# Altium PCB MainDesign_Small.PcbDoc
Units mm, origin at the board's own origin, x right, y up, seen from the top; angles counter-clockwise.
Board outline 20.1 x 20.19 mm, 2 copper layers (Top Layer, Bottom Layer); 51 components, 39 nets, 207 pads, 58 vias.
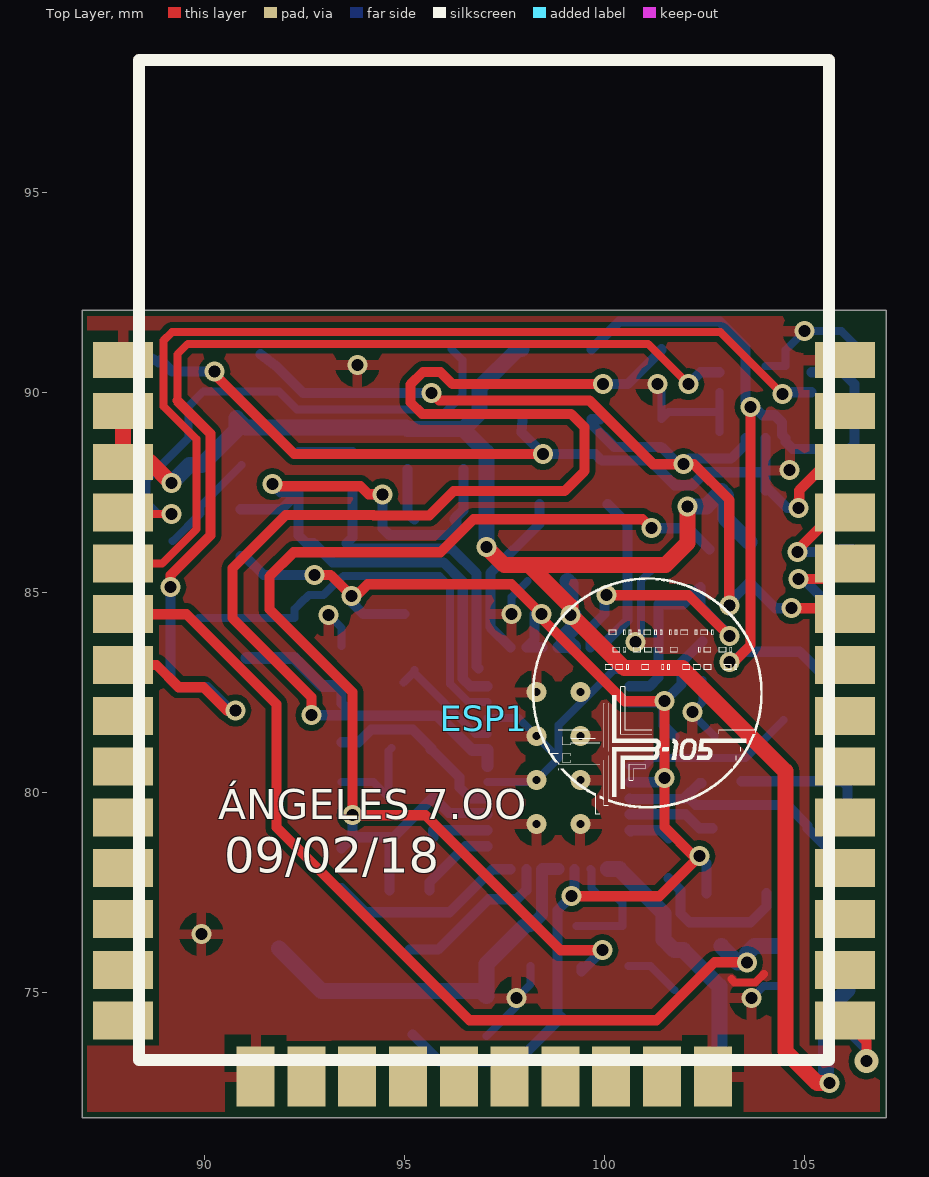
[diagram p0: Top Layer view]
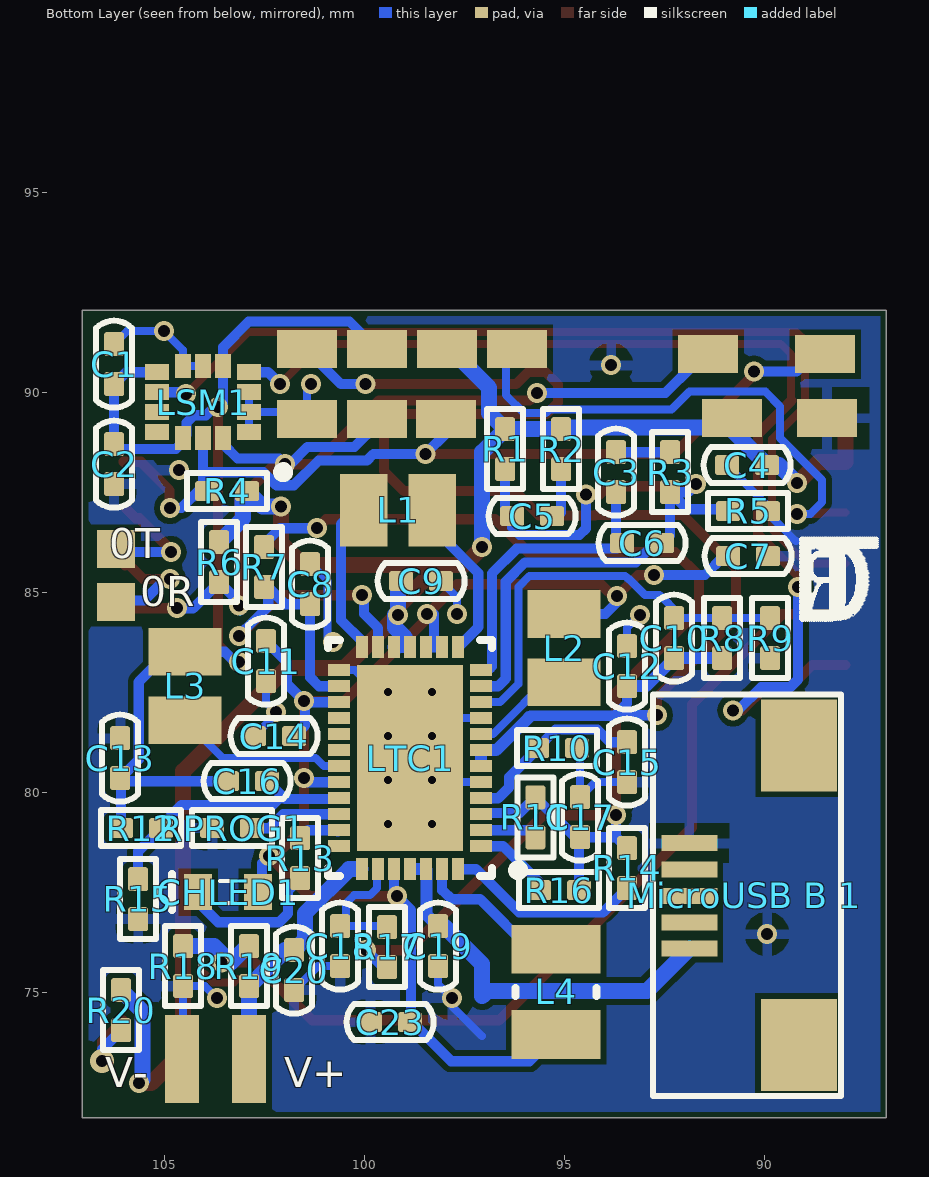
[diagram p1: Bottom Layer view, seen from below]
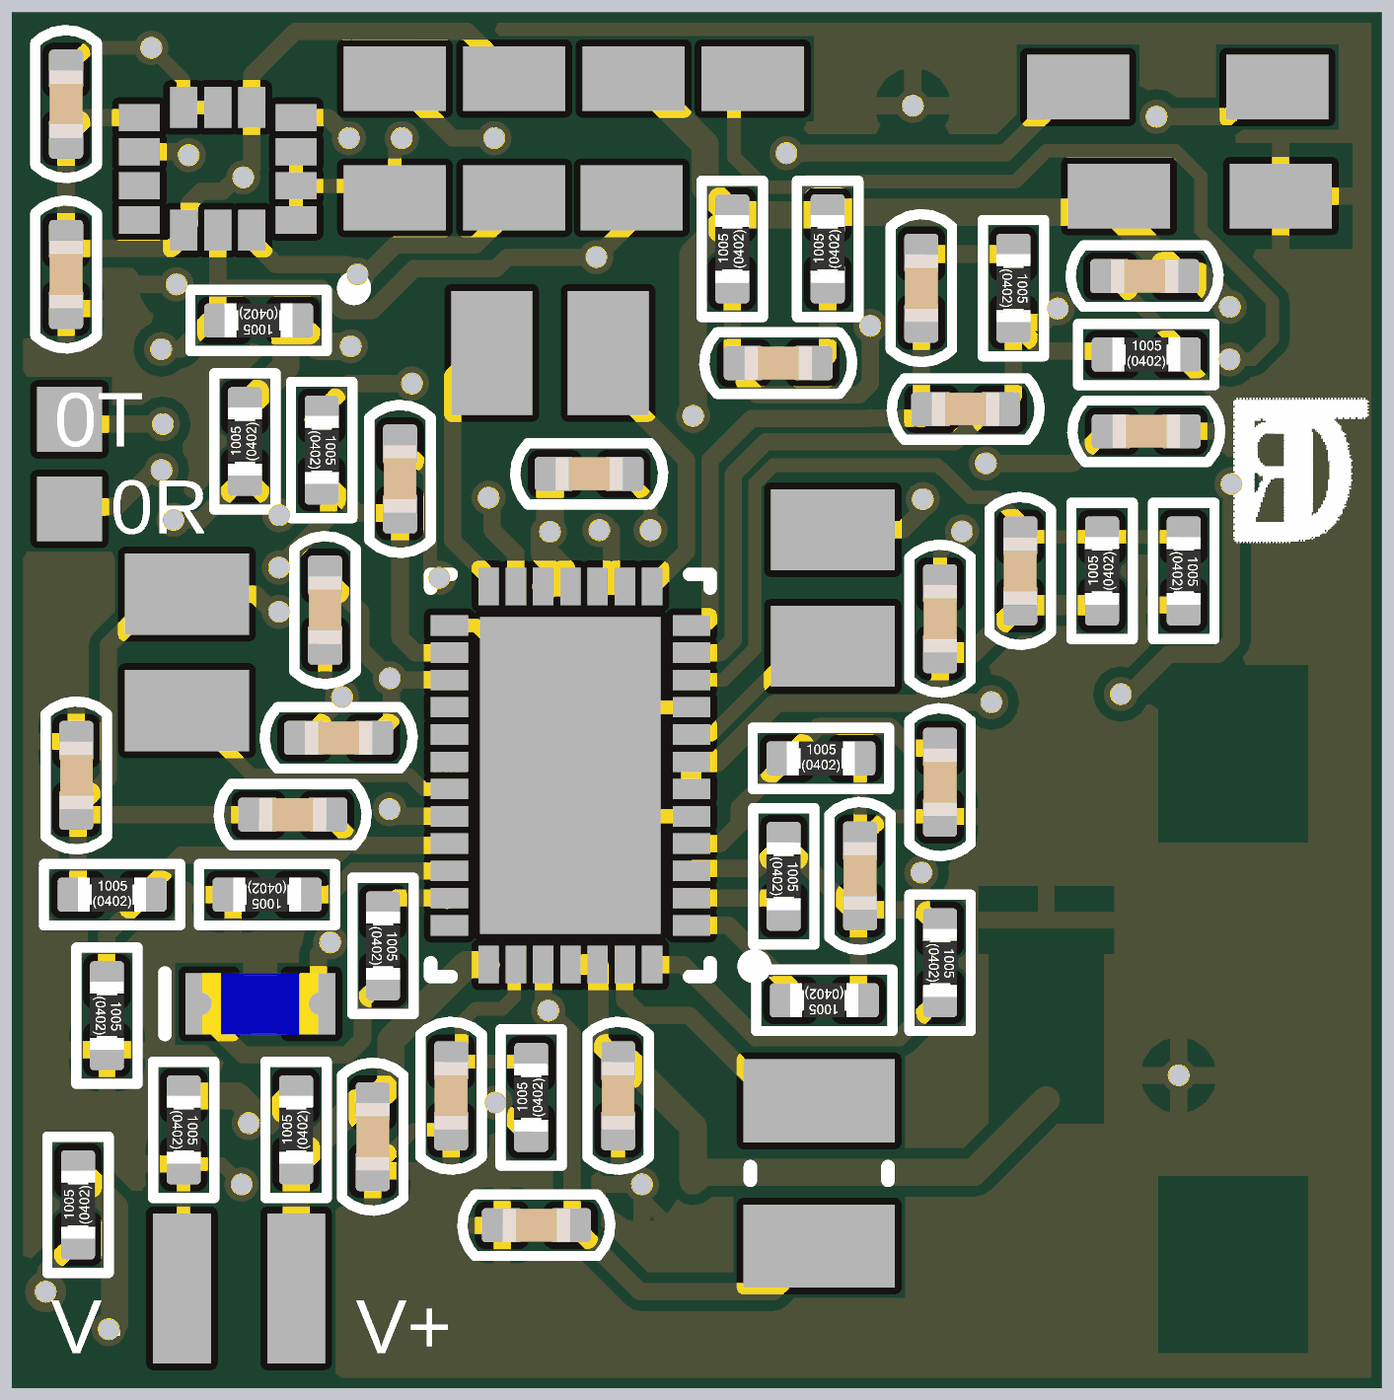
[diagram p2: 3D render of the assembled board from below, using the file's embedded part models]

## Layer stack, top to bottom
Top Solder: solder mask 0.0102, Solder Resist, Dk 3.5
Top Layer: signal copper 0.0356
Dielectric 1: dielectric 0.32, FR-4, Dk 4.8
Bottom Layer: signal copper 0.0356
Bottom Solder: solder mask 0.0102, Solder Resist, Dk 3.5

## Board outline
86.944,71.857 86.944,92.05 107.048,92.05 107.048,71.857

## Design rules (kind name [scope] priority, off if disabled: settings)
Clearance [All] p1: gap=0.15 ignorepadtopadclearanceinfootprint=TRUE except(0: Arc-Hole Track-Hole SMDPad-Hole THPad-Hole Via-Hole Fill-Hole Poly-Hole Region-Hole Text-Hole; 0.09: Arc-Arc Arc-Track Arc-SMDPad Track-Track Track-SMDPad SMDPad-SMDPad)
ComponentClearance VbatClearance [InComponent('10114830')] p1: gap=0.01 collisioncheckmode=3 verticalgap=0.01 showdistances=FALSE
ComponentClearance ComponentClearance_1 [All] p2: gap=0.254 collisioncheckmode=3 verticalgap=0.254 showdistances=FALSE
HoleSize [All] p1: absolutevalues=TRUE maxlimit=6.3 minlimit=0.3 maxpercent=80.000 minpercent=20.000
PolygonConnect [All] p1: connectstyle=Relief reliefconductorwidth=0.25 reliefentries=4 polygonreliefangle="90 Angle" airgapwidth=0.3
RoutingVias [All] p1: holewidth=0.3 width=0.6 viastyle="Through Hole" minholewidth=0.3 minwidth=0.6 maxholewidth=6.3 maxwidth=10.6
SilkToSilkClearance [All] p1: silktosilkclearance=0
SilkToSolderMaskClearance [IsPad] p1: minsilkscreentomaskgap=0 clearancetoexposedcopper=TRUE
SolderMaskExpansion [All] p1: expansion=0.102
Width [All] p1: maxlimit=10 minlimit=0.15 preferedwidth=0.25
26 further rules are at their usual default settings.

## Components (designator, comment, footprint, x,y, rotation, side; value= is the part's Value field where it differs from the comment)
C1 "Cap" "0402 CAP" 106.25,90.7 r270 bottom value=100n (schematic designator C4)
C2 "Cap" "0402 CAP" 106.25,88.2 r90 bottom value=100n (schematic designator C3)
C3 "Cap" "0402 CAP" 93.7,88 r270 bottom value=330p (schematic designator C19)
C4 "Cap" "0402 CAP" 90.425,88.175 r180 bottom value=100u (schematic designator C5)
C5 "Cap" "0402 CAP" 95.8,86.9 r0 bottom value=33p (schematic designator C23)
C6 "Cap" "0402 CAP" 93.05,86.225 r0 bottom value=10p (schematic designator C20)
C7 "Cap" "0402 CAP" 90.4,85.9 r0 bottom value=2.2u (schematic designator C22)
C8 "Cap" "0402 CAP" 101.35,85.2 r270 bottom value=100n
C9 "Cap" "0402 CAP" 98.575,85.275 r0 bottom value=22u (schematic designator C21)
C10 "Cap" "0402 CAP" 92.25,83.85 r270 bottom value=10p (schematic designator C16)
C11 "Cap" "0402 CAP" 102.45,83.275 r270 bottom value=1u (schematic designator C18)
C12 "Cap" "0402 CAP" 93.425,83.15 r270 bottom value=22u/100u (schematic designator C15)
C13 "Cap" "0402 CAP" 106.1,80.85 r270 bottom value=10u (schematic designator C14)
C14 "Cap" "0402 CAP" 102.25,81.4 r180 bottom value=10u (schematic designator C17)
C15 "Cap" "0402 CAP" 93.425,80.75 r90 bottom value=100n (schematic designator C12)
C16 "Cap" "0402 CAP" 102.925,80.275 r0 bottom value=10p (schematic designator C13)
C17 "Cap" "0402 CAP" 94.6,79.375 r270 bottom value=1u (schematic designator C11)
C18 "Cap" "0402 CAP" 100.6,76.15 r90 bottom value=1u (schematic designator C10)
C19 "Cap" "0402 CAP" 98.15,76.15 r90 bottom value=22u/100u (schematic designator C6)
C20 "Cap" "0402 CAP" 101.75,75.55 r270 bottom value=4.7u (schematic designator C9)
C23 "Cap" "0402 CAP" 99.35,74.25 r180 bottom value=22u (schematic designator C7)
CHLED1 "LED" "0603 LED-BLUE" 103.4,77.5 r0 bottom
ESP1 "ESP32" ESP32 94.97,85.8 r0 top locked
L1 "L?" "Inductor 0806 [2016]" 99.15,87.05 r0 bottom value=2.2u (schematic designator L4)
L2 "L?" "Inductor 0806 [2016]" 95,83.6 r90 bottom value=2.2u (schematic designator L3)
L3 "L?" "Inductor 0806 [2016]" 104.475,82.655 r90 bottom value=4.7u (schematic designator L2)
L4 "L?" "Inductor 1008 [2520]" 95.2,75.01 r270 bottom value=3.3u (schematic designator L1)
LSM1 "LSM6DS3" LSM6DS3 104.025,89.75 r0 bottom
LTC1 "LTC3586" LTC3586/LTC3586-1 98.85,80.85 r0 bottom
"MicroUSB B 1" "MicroUSB B 2.0" "MicroUSB B 2.0" 188.261,172.608 r90 bottom (schematic designator "MicroUSB B 2.0")
R1 "Res" "0402 Res" 96.475,88.575 r90 bottom value=324K (schematic designator R18)
R2 "Res" "0402 Res" 95.075,88.575 r90 bottom value=121K (schematic designator R20)
R3 "Res" "0402 Res" 92.35,88 r270 bottom value=15K (schematic designator R17)
R4 "Res" "0402 Res" 103.425,87.525 r0 bottom value=1K (schematic designator R1)
R5 "Res" "0402 Res" 90.4,87.025 r180 bottom value=105K (schematic designator R19)
R6 "Res" "0402 Res" 103.625,85.75 r90 bottom value=1K (schematic designator R3)
R7 "Res" "0402 Res" 102.5,85.625 r270 bottom value=1K (schematic designator R2)
R8 "Res" "0402 Res" 91.05,83.85 r90 bottom value=88k7 (schematic designator R14)
R9 "Res" "0402 Res" 89.85,83.85 r270 bottom value=16k9 (schematic designator R16)
R10 "Res" "0402 Res" 95.175,81.1 r180 bottom value=2K87 (schematic designator R12)
R11 "Res" "0402 Res" 95.72,79.37 r270 bottom value=0
R12 "Res" "0402 Res" 105.575,79.1 r180 bottom value=1M02 (schematic designator R13)
R13 "Res" "0402 Res" 101.6,78.35 r270 bottom value=1K (schematic designator R8)
R14 "Res" "0402 Res" 93.425,78.1 r270 bottom value=10K (schematic designator R6)
R15 "Res" "0402 Res" 105.65,77.325 r270 bottom value=806K
R16 "Res" "0402 Res" 95.125,77.55 r0 bottom value=0 (schematic designator R9)
R17 "Res" "0402 Res" 99.425,76.125 r90 bottom value=1K (schematic designator R7)
R18 "Res" "0402 Res" 104.525,75.65 r270 bottom value=4K3 (schematic designator R5)
R19 "Res" "0402 Res" 102.875,75.65 r90 bottom value=10K (schematic designator R4)
R20 "Res" "0402 Res" 106.075,74.55 r90 bottom value=0 (schematic designator R10)
RPROG1 "Res" "0402 Res" 103.3,79.1 r0 bottom value=3K57

## Footprints (in the part's own frame and the unit in brackets; to place one, negate y for a bottom-side part, rotate by r counter-clockwise, add the part's x,y. Pads: shape width x height; smd on the part's side, far side on the other; paste and mask are expansions set on the pad)
"0402 CAP" [mm] "Chip Capacitor, Body 1.0x0.5mm, IPC High Density"
  rrect25% 0.6x0.5 smd: 1(-0.5,0) 2(0.5,0)
  Top Layer pour cut-out: -0.2,0.25 -0.2,-0.25 0.2,-0.25 0.2,0.25
  silkscreen extent -1.09,-0.45 1.09,0.45, body extent -0.5,-0.25 0.5,0.25, height 0.49
"0402 Res" [mm] "Chip Resistor, Body 1.0x0.5mm, IPC High Density"
  rrect25% 0.6x0.5 smd: 1(-0.5,0) 2(0.5,0)
  Top Layer pour cut-out: -0.2,0.25 -0.2,-0.25 0.2,-0.25 0.2,0.25
  silkscreen extent -1,-0.45 1,0.45, body extent -0.5,-0.25 0.5,0.25, height 0.35
"0603 LED-BLUE" [mm] "LED, Body 1.6x0.8mm, IPC High Density"
  rect 0.7x0.9 smd: 1(-0.75,0) 2(0.75,0)
  silkscreen extent -0.2,-0.45 1.4,0.45, body extent -0.85,-0.45 0.85,0.45, height 0.9
ESP32 [mm]
  rect 1.5x0.9 smd: 1(-7,5) 2(-7,3.73) 3(-7,2.46) 36(11.05,2.46) 37(11.05,3.73) 38(11.05,5)
  rect 1.5x0.95 smd: 4(-7,1.19) 5(-7,-0.08) 6(-7,-1.35) 7(-7,-2.62) 8(-7,-3.89) 9(-7,-5.16) 10(-7,-6.43) 11(-7,-7.7) 12(-7,-8.97) 13(-7,-10.24) 14(-7,-11.51) 25(11.05,-11.51) 26(11.05,-10.24) 27(11.05,-8.97) 28(11.05,-7.7) 29(11.05,-6.43) 30(11.05,-5.16) 31(11.05,-3.89) 32(11.05,-2.62) 33(11.05,-1.35) 34(11.05,-0.08) 35(11.05,1.19)
  rect 0.95x1.5 smd: 15(-3.69,-12.91) 16(-2.42,-12.91) 17(-1.15,-12.91) 18(0.12,-12.91) 19(1.39,-12.91) 20(2.66,-12.91) 21(3.93,-12.91) 22(5.2,-12.91) 23(6.47,-12.91) 24(7.74,-12.91)
  silkscreen extent -6.6,-12.5 10.65,12.5, body extent -6.63,-12.5 10.68,12.55, height 2
"Inductor 0806 [2016]" [mm]
  rect 1.19x1.82 smd: 1(-0.855,0) 2(0.855,0)
  body extent -1.1,-0.9 1.1,0.9, height 1
"Inductor 1008 [2520]" [mm]
  rect 1.22x2.22 smd: 1(-1.065,0) 2(1.065,0)
  silkscreen extent -0.1,-1.01 0.1,1.01, body extent -1.3,-1.1 1.3,1.1, height 1
LSM6DS3 [mm]
  rect 0.6x0.4 smd: 1(-1.15,0.75) 2(-1.15,0.25) 3(-1.15,-0.25) 4(-1.15,-0.75) 8(1.15,-0.75) 9(1.15,-0.25) 10(1.15,0.25) 11(1.15,0.75)
  rect 0.4x0.6 smd: 5(-0.5,-0.9) 6(0,-0.9) 7(0.5,-0.9) 12(0.5,0.9) 13(0,0.9) 14(-0.5,0.9)
  silkscreen extent -2.12,1.63 -1.88,1.87, body extent -1.55,-1.3 1.55,1.3, height 0.86
LTC3586/LTC3586-1 [mm]
  rect 0.55x0.3 smd: 1(-1.775,2.2) 2(-1.775,1.8) 3(-1.775,1.4) 4(-1.775,1) 5(-1.775,0.6) 6(-1.775,0.2) 7(-1.775,-0.2) 8(-1.775,-0.6) 9(-1.775,-1) 10(-1.775,-1.4) 11(-1.775,-1.8) 12(-1.775,-2.2) 20(1.775,-2.2) 21(1.775,-1.8) 22(1.775,-1.4) 23(1.775,-1) 24(1.775,-0.6) 25(1.775,-0.2) 26(1.775,0.2) 27(1.775,0.6) 28(1.775,1) 29(1.775,1.4) 30(1.775,1.8) 31(1.775,2.2)
  rect 0.3x0.55 smd: 13(-1.2,-2.775) 14(-0.8,-2.775) 15(-0.4,-2.775) 16(0,-2.775) 17(0.4,-2.775) 18(0.8,-2.775) 19(1.2,-2.775) 32(1.2,2.775) 33(0.8,2.775) 34(0.4,2.775) 35(0,2.775) 36(-0.4,2.775) 37(-0.8,2.775) 38(-1.2,2.775)
  rect 2.65x4.65 smd: 39(0,0)
  silkscreen extent -2.82,-2.95 2.05,2.95, body extent -2.05,-2.95 2.05,2.95, height 0.8
"MicroUSB B 2.0" [mm]
  rect 2.3x1.9 smd: 0(-98.933,-99.136) 0(-91.44,-99.136)
  rect 0.4x1.4 smd: 1(-96.52,-96.393) 2(-95.86,-96.393) 3(-95.199,-96.393) 4(-94.539,-96.393) 5(-93.878,-96.393)
  silkscreen extent -100.2,-100.18 -90.17,-95.48, body extent -99.6,-101.99 -90.8,-96.39, height 2.89

## Part data
L1 L2 L3 L4: library part Ind
LSM1: Supplier Part Number 1=497-15383-1-ND, Supplier 1=Digi-Key
LTC1: library part LTC3586/LTC3586-1

## Free pads (board coordinates)
  rect 1.5x0.95 smd far side: 5(88.425,89.35) 5(88.475,90.95) 5(90.8,89.35) 5(91.4,90.95) 5(96.175,91.075) 5(97.925,91.075) 5(97.95,89.325) 5(99.675,89.325) 5(99.675,91.075) 5(101.425,89.325) 5(101.425,91.075)
  rect 0.95x0.95 smd far side: 5(106.2,84.76) 5(106.2,86.075)
  rect 0.85x2.2 smd far side: 6(104.55,73.325) 7(102.875,73.325)

## Via types
v1: diameter 0.5, hole 0.3, Top Layer to Bottom Layer, tented both sides, 49 vias
v2: diameter 0.5, hole 0.2, Top Layer to Bottom Layer, 8 vias
v3: diameter 0.6, hole 0.3, Top Layer to Bottom Layer, tented both sides, 1 vias

## Nets (pads, with @x,y where several pads share a name; then routed paths per layer and width w, separated by ;. In a path a pad name is that pad's centre, name@x,y a point inside that pad or via, vN(x,y) a via of type N, cw(c..) or ccw(c..) an arc to the next point about the centre after c; other vN are vias at no path point)
1.8V: C1.2 C2.2 C13.2 C16.2 L3.2 LSM1.5 LSM1.8 LSM1.12 pad.5@99.675,91.075 R12.1 | length 27.8
  Top Layer w0.254: v1(103.125,83.25) 103.225,83.25 103.625,83.65 103.625,83.655 103.652,83.682 103.652,84.399 103.649,84.396 103.649,85.226 v1(103.65,89.625)
  Bottom Layer w0.254: pad.5@99.675,91.075 100.367,91.767 102.883,91.767 103.525,91.125 LSM1.5 103.525,89.75 v1(103.65,89.625) ; v1(103.125,83.25) 103.22,83.25 103.48,83.51 L3.2 104.881,83.51 105.633,82.758 105.633,80.817 C13.2 ; C16.2 C13.2@105.95,80.275 ; v1@103.7,89.675 103.952,89.423 104.259,89.423 104.442,89.24 104.442,88.933 LSM1.12 104.525,88.76 104.702,88.583 106.133,88.583 C2.2 C1.2 105.95,90.5 LSM1.8 ; C13.2@105.987,80.238 106.075,80.15 R12.1
3.3V: C4.2 C9.2 ESP1.2 ESP1.3 LTC1.16 LTC1.17 pad.5@90.8,89.35 pad.5@97.925,91.075 R1.2 R2.2 R4.1 R6.2 R20.2 | length 47.8
  Top Layer w0.4: ESP1.2 ESP1.3 88.64,88.26 v1(89.175,87.725) ; v1(97.05,86.125) 97.5,85.675 101.525,85.675 102.075,86.225 102.073,86.225 v1(102.073,87.146) ; 98.125,85.675 99.15,84.65 v1@99.15,84.476 ; v1(99.15,84.425) v1@99.15,84.45 ; v1(105.625,72.725) 105.325,72.725 104.525,73.525 104.525,80.525 101.95,83.1 100.5,83.1 v1@99.15,84.45 ; v1@99.15,84.45 99.137,84.463 v1@99.15,84.476 ; v1@99.15,84.45 v1@99.15,84.476
  Bottom Layer w0.254: LTC1.17@99.21,83.625 LTC1.17
  Bottom Layer w0.3: LTC1.16 LTC1.17@99.21,83.625
  Bottom Layer w0.4: v1(89.175,87.725) 89.625,88.175 C4.2 90.8,89.05 90.8,89.35 91.036,89.114 95.035,89.114 R2.2 R1.2 ; v1(97.05,86.125) 97.05,88.5 R1.2 ; pad.5@97.925,91.075 97.84,91.075 96.875,90.11 96.875,89.475 R1.2 ; C9.2 99.15,85.2 v1(99.15,84.425) ; LTC1.17@99.21,83.625 98.975,83.86 99.233,84.118 v1@99.233,84.433 ; v1(102.073,87.146) 102.546,87.146 R4.1 103.042,87.408 103.042,87.141 103.025,87.124 103.025,86.85 R6.2 ; v1(105.625,72.725) 105.535,72.815 105.535,74.51 R20.2
5V: C10.2 C12.2 LTC1.6 LTC1.7 pad.5@101.425,91.075 R8.1 | length 36
  Top Layer w0.25: v1(92.675,81.925) 92.675,82.375 90.7,84.35 90.7,85.6 92.025,86.925 94.229,86.925 94.233,86.922 95.626,86.922 96.229,87.525 99,87.525 99.5,88.025 99.5,89.125 99.171,89.454 95.446,89.454 95.155,89.745 95.155,90.197 95.462,90.504 95.897,90.504 96.202,90.2 v1(99.966,90.2)
  Bottom Layer w0.25: v1(99.966,90.2) 100.575,90.2 101.425,91.05 pad.5@101.425,91.075
  Bottom Layer w0.254: v1(92.675,81.925) 93.725,81.925 93.425,82.225 C12.2 ; 93.739,81.911 95.839,81.911 95.875,81.875
  Bottom Layer w0.3: R8.1 C10.2 92.95,82.65 C12.2 ; 95.875,81.875 96.7,81.05 LTC1.7 LTC1.6
EN1_EN3: C8.2 LTC1.18 LTC1.21 R7.2 | length 10.4
  Top Layer w0.254: v1(100.05,84.925) 102.1,84.925 v1(103.125,83.9)
  Bottom Layer w0.254: LTC1.18 99.65,84.105 100,84.455 100,84.875 v1(100.05,84.925) ; LTC1.21 101.13,82.65 101.35,82.87 C8.2 101.975,84.7 102.398,85.123 102.398,84.647 102.753,84.292 103.125,83.92 v1(103.125,83.9)
EN4: C18.2 LTC1.33 R17.2 | length 3.1
  Bottom Layer w0.2: R17.2@99.3,76.65 100.45,76.65 100.45,77.225 100.25,77.425 99.85,77.425 99.675,77.6 99.675,78.05 LTC1.33
GND: "MicroUSB B 1.5" C1.1 C2.1 C4.1 C7.1 C8.1 C9.1 C11.2 C12.1 C13.1 C14.1 C15.1 C17.1 C18.1 C19.1 C20.2 C23.1 ESP1.1 ESP1.15 ESP1.24 ESP1.38 LSM1.1 LSM1.2 LSM1.3 LSM1.6 LSM1.7 LTC1.5 LTC1.9 LTC1.20 LTC1.39 pad.5@88.425,89.35 pad.5@101.425,89.325 pad.6 R5.2 R9.2 R10.2 R15.2 R18.2 RPROG1.2 | length 32.2
  Top Layer w0.2: 103.175,75.325 103.252,75.248 103.776,75.248 103.986,75.458
  Bottom Layer w0.2: 89.207,86.275 89.9,86.968 R5.2 89.9,87.15 C4.1 ; v1(93.105,84.429) 93.425,84.109 C12.1 ; C15.1 94.225,80.25 C17.1 94.6,81.025 R10.2 ; 97.05,73.9 97.8,74.65 v1(97.8,74.85) 98.15,75.2 C19.1 ; LTC1.5 98.25,80.25 v2(98.3,80.3) LTC1.39 ; LTC1.9 97.85,81.85 LTC1.39 ; v1(97.675,84.45) 97.675,84.875 C9.1 ; C18.1 101.15,75.65 C20.2 ; LTC1.20 100.225,83.05 98.85,81.675 LTC1.39 ; v1(100.775,83.75) 100.91,83.885 100.91,85.285 101.325,85.7 C8.1 ; v1(101.325,90.2) 101.425,90.1 101.425,89.325 101.6,89.5 LSM1.2 ; C11.2@102.45,82.8 102.45,82.25 v1(102.2,82) 102.2,81.95 C14.1 ; LSM1.1 LSM1.2 ; LSM1.3 LSM1.2 ; v1(103.675,74.85) 103.975,75.15 R18.2 104.525,73.35 pad.6 ; LSM1.6 LSM1.7 104.525,91.05 v1(105,91.525) 105.925,91.525 C1.1
  other v1: 89.925,76.45 104.63,88.054 93.825,90.675
  other v2: 98.3,79.2 99.4,79.2 99.4,80.3 98.3,81.4 99.4,81.4 98.3,82.5 99.4,82.5
INT_MAX30105: ESP1.4 pad.5@96.175,91.075 | length 13.6
  Top Layer w0.2: ESP1.4 88.61,86.99 88.574,86.954 v1(89.179,86.954)
  Bottom Layer w0.2: v1(89.179,86.954) 88.846,86.954 88.55,87.25 88.55,87.807 89.6,88.857 89.6,89.644 89.971,90.015 91.864,90.015 92.314,89.565 95.367,89.565 95.453,89.479 96.004,89.479 96.45,89.925 96.45,90.8 pad.5@96.175,91.075
LDO3V3: C17.2 LTC1.3 R7.1 R11.1 R14.1 R16.1 R17.1 | length 33.5
  Top Layer w0.254: v1(99.95,76.05) 98.9,76.05 95.525,79.425 v1(93.7,79.425) 93.7,82.5 91.625,84.575 91.625,85.395 92.23,86 95.9,86 96.725,86.825 100.95,86.825 v1(101.175,86.6)
  Bottom Layer w0.254: R14.1 93.7,78.875 ; v1(93.7,79.425) 93.7,78.875 ; R16.1 94.625,78.85 C17.2 ; LTC1.3 97.042,79.483 96.106,79.483 R11.1 94.725,78.875 C17.2 ; R17.1 99.425,75.525 v1(99.95,76.05) ; v1(101.175,86.6) 102.092,86.6 102.096,86.604 R7.1@102.625,86.075 ; 93.7,78.875 C17.2
NetC3_1: C3.1 R3.1 | length 1.3
  Bottom Layer w0.254: R3.1 C3.1
NetC3_2: C3.2 C6.2 LTC1.12 | length 7.3
  Bottom Layer w0.254: C3.2 93.7,86.375 C6.2 93.685,86.09 94.473,86.09 94.475,86.089 96.186,86.089 96.804,85.471 96.804,83.146 LTC1.12@96.85,83.1
NetC5_1: C5.1 R2.1 | length 1.3
  Bottom Layer w0.254: R2.1 95.075,87 C5.1@95.25,86.825
NetC5_2: C5.2 C6.1 LTC1.11 R1.1 R3.2 R5.1 | length 18.5
  Top Layer w0.254: v1(91.7,87.7) 91.7,87.65 93.9,87.65 94.103,87.447 v1(94.45,87.447)
  Bottom Layer w0.254: R5.1@90.9,87.075 91.925,87.075 R3.2 ; v1(91.7,87.7) 91.9,87.5 R3.2 ; v1(94.45,87.447) 94.45,86.6 94.617,86.433 96.108,86.433 96.3,86.625 C5.2 ; C5.2@96.25,86.825 96.475,87.05 R1.1 ; LTC1.11 96.65,82.65 96.46,82.84 96.46,85.263 95.978,85.745 94.332,85.745 94.331,85.746 93.209,85.746 92.73,86.225 C6.1 92.35,86.425 R3.2
NetC7_2: C7.2 C11.1 C14.2 C23.2 CHLED1.1 L2.2 L4.2 LTC1.14 LTC1.15 LTC1.22 LTC1.27 LTC1.34 | length 37.6
  Top Layer w0.254: v1(92.755,85.429) 93.155,85.429 v1(93.68,84.904) 93.68,84.795 94.084,85.2 97.675,85.2 v1(98.425,84.45) 98.425,84.35 100.5,82.275 v1(101.5,82.275) 101.505,82.27 v1(101.505,80.355) 101.505,79.128 102.233,78.4 v1(102.375,78.4) 101.375,77.4 v1(99.175,77.4)
  Bottom Layer w0.254: C7.2 91.008,85.9 91.479,85.429 v1(92.755,85.429) ; v1(93.68,84.904) 93.68,84.795 93.655,84.77 93.97,84.455 L2.2 ; L4.2 95.87,73.275 97.825,73.275 C23.2@98.925,74.375 ; v1(98.425,84.45) 98.25,84.45 98.25,83.825 LTC1.14 LTC1.15 ; C23.2@98.825,74.375 98.825,77.05 v1(99.175,77.4) 99.25,77.475 LTC1.34 ; LTC1.27 101.4,80.25 v1(101.505,80.355) ; LTC1.22 101.475,82.25 101.475,81.675 C14.2 ; v1(101.5,82.275) 101.925,82.7 101.925,83.25 C11.1 ; v1(102.375,78.4) 102.55,78.225 CHLED1.1@102.55,77.475
NetC10_1: C10.1 LTC1.10 R8.2 R9.1 | length 10.5
  Bottom Layer w0.2: R9.1 R8.2 C10.1 92.25,84.575 92.504,84.829 92.512,84.829 92.612,84.929 92.979,84.929 93.392,85.342 93.41,85.342 93.472,85.404 95.871,85.404 96.143,85.132 96.143,82.709 96.602,82.25 LTC1.10
NetC15_2: C15.2 LTC1.4 R10.1 | length 4.7
  Bottom Layer w0.254: C15.2 93.85,81.25 94.167,81.567 95.208,81.567 R10.1 95.65,81.075 95.675,81.075 96.375,80.375 96.375,80.125 96.65,79.85 LTC1.4
NetC16_1: C16.1 LTC1.28 R12.2 R15.1 | length 6.9
  Bottom Layer w0.254: LTC1.28@100.625,79.846 100.643,79.828 101.978,79.828 101.996,79.846 ; C16.1@102.425,80.225 102.375,80.225 101.996,79.846 ; R15.1 105.65,78.525 R12.2 105.075,79.166 104.558,79.683 102.278,79.683 102.115,79.846 101.996,79.846
NetC19_2: "MicroUSB B 1.1" C19.2 LTC1.35 LTC1.36 | length 9.7
  Bottom Layer w0.3: C19.2 98.44,76.94 98.44,78.065 LTC1.36 LTC1.35
  Bottom Layer w0.4: 91.868,76.088 92.931,75.025 96.925,75.025 97.05,74.9 97.05,75.7 C19.2@97.975,76.625
NetCHLED1_2: CHLED1.2 R13.2 | length 3.7
  Bottom Layer w0.254: R13.2 101.9,77.55 101.9,76.975 102.125,76.75 103.65,76.75 104.05,77.15 CHLED1.2@104.05,77.475
NetESP1_5: ESP1.5 LSM1.9 | length 24.2
  Top Layer w0.2: ESP1.5 88.945,85.72 89.8,86.575 89.8,88.825 88.979,89.646 88.979,91.289 89.19,91.5 102.9,91.5 v1(104.45,89.95)
  Bottom Layer w0.254: v1(104.45,89.95) 104.5,90 LSM1.9
NetESP1_6: ESP1.6 R18.1 R19.2 | length 24.2
  Top Layer w0.254: ESP1.6 89.55,84.45 91.8,82.2 91.8,79.125 96.625,74.3 101.3,74.3 102.75,75.75 102.752,75.748 v1(103.569,75.748)
  Bottom Layer w0.4: R19.2@102.925,76.15 103.327,75.748 v1(103.569,75.748) 103.569,75.969 103.75,76.15 R18.1@104.5,76.15
NetESP1_7: ESP1.7 LSM1.4 | length 28.3
  Top Layer w0.2: 89.323,89.788 89.323,90.948 89.585,91.21 101.09,91.21 v1(102.1,90.2)
  Top Layer w0.254: ESP1.7 88.8,83.18 89.355,82.625 89.975,82.625 90.556,82.044 v1(90.773,82.044) ; v1(89.15,85.125) 89.15,85.425 90.15,86.425 90.15,88.961 89.323,89.788
  Bottom Layer w0.254: v1(89.15,85.125) 89.15,82.825 89.35,82.625 90.075,82.625 90.656,82.044 v1(90.773,82.044) ; v1(102.1,90.2) 102.4,90.5 LSM1.4
NetESP1_17: ESP1.17
NetESP1_18: ESP1.18
NetESP1_25: ESP1.25 R20.1 | length 2.2
  Top Layer w0.254: ESP1.25 106.55,73.76 v3(106.55,73.275)
  Bottom Layer w0.254: R20.1 106.55,73.575 v3(106.55,73.275)
NetESP1_34: ESP1.34 pad.5@106.2,84.76 | length 3
  Top Layer w0.254: v1(104.85,85.331) 105.522,85.331 105.92,85.729 105.975,85.675 ESP1.34
  Bottom Layer w0.254: v1@104.802,85.331 104.969,85.331 105.5,84.8 pad.5@106.2,84.76
NetESP1_35: ESP1.35 pad.5@106.2,86.075 | length 3
  Top Layer w0.254: v1(104.83,86.004) 104.83,86.062 105.618,86.85 105.71,86.85 ESP1.35@105.935,87.075
  Bottom Layer w0.254: v1(104.83,86.004) 105.829,86.004 105.9,86.075 pad.5@106.2,86.075
NetL1_1: L1.1 LTC1.13 | length 4.3
  Bottom Layer w0.254: LTC1.13 97.148,84.127 97.148,85.478 98.375,86.705 L1.1@98.375,87.2
NetL1_2: L1.2 LTC1.19 | length 4
  Bottom Layer w0.254: LTC1.19 100.05,83.77 100.577,84.297 100.577,86.708 L1.2@100.085,87.2
NetL2_1: L2.1 LTC1.8 | length 2.9
  Bottom Layer w0.2: L2.1@94.975,82.745 L2.1@95.25,83.02 ; L2.1@95.25,83.05 95.25,82.981 96.781,81.45 LTC1.8
NetL3_1: L3.1 LTC1.26 | length 4.3
  Bottom Layer w0.2: LTC1.26 101.005,80.65 101.21,80.855 101.712,80.855 101.717,80.85 103.525,80.85 L3.1
NetL4_1: L4.1 LTC1.37 | length 4
  Bottom Layer w0.254: L4.1@95.125,76.065 95.84,76.065 97.1,77.325 97.812,77.325 98.031,77.544 ; 98.05,77.544 LTC1.37
NetLTC1_1: LTC1.1 R16.2 | length 2
  Bottom Layer w0.254: R16.2 95.625,77.75 96.525,78.65 LTC1.1
NetLTC1_2: LTC1.2 R11.2 | length 1.9
  Bottom Layer w0.254: R11.2 95.72,79.05 LTC1.2 96.743,79.05
NetLTC1_29: LTC1.29 RPROG1.1 | length 2.2
  Bottom Layer w0.254: LTC1.29 102.025,79.45 102.375,79.1 RPROG1.1@102.7,79.1
NetLTC1_30: LTC1.30 R13.1 | length 1.1
  Bottom Layer w0.254: LTC1.30@100.658,79.017 LTC1.30 101.4,79.05 R13.1
NetLTC1_38: LTC1.38 R14.2 | length 4.9
  Bottom Layer w0.254: R14.2 94.025,77 96.125,77 97.2,78.075 LTC1.38
SCL_MAX30205: ESP1.36 LSM1.13 pad.5@88.475,90.95 pad.5@97.95,89.325 R4.2 | length 22.4
  Top Layer w0.254: v1(90.25,90.515) 90.25,90.45 92.244,88.456 v1(98.469,88.456) ; v1(104.855,87.104) 104.855,87.309 104.87,87.323 104.87,87.545 105.585,88.26 ESP1.36
  Bottom Layer w0.254: pad.5@88.475,90.95 88.85,90.75 88.904,90.804 89.194,90.515 v1(90.25,90.515) ; pad.5@97.95,89.3 97.925,89 v1(98.469,88.456) 99.769,88.456 99.936,88.289 101.141,88.289 101.757,87.673 102.193,87.673 102.518,87.998 103.309,87.998 103.311,88 104.025,88 ; LSM1.13 104.025,87.55 104.075,87.6 104.571,87.104 v1(104.855,87.104)
SDA_MAX30205: ESP1.33 LSM1.14 pad.5@91.4,90.95 pad.5@99.675,89.325 R6.1 | length 24.5
  Top Layer w0.254: v1(95.68,89.979) 95.863,89.796 99.625,89.796 101.221,88.2 v1(101.975,88.2) 102.233,88.2 103.125,87.308 103.122,87.306 v1(103.122,84.668) ; v1(104.675,84.6) 105.87,84.6 ESP1.33
  Bottom Layer w0.254: pad.5@91.4,90.95 91.812,90.638 92.471,89.979 v1(95.68,89.979) ; pad.5@99.893,89.325 99.675,89.325 99.675,89.2 100.242,88.633 101.417,88.633 101.85,88.2 v1(101.975,88.2) 102.117,88.342 103.167,88.342 103.525,88.7 LSM1.14 ; v1@103.1,84.55 v1@103.122,84.572 ; v1@103.18,84.63 v1@103.122,84.572 ; v1(104.675,84.6) 104.275,84.6 R6.1 103.122,84.747 v1(103.122,84.668) v1@103.122,84.572
VBAT: C20.1 LTC1.32 pad.7 R19.1 | length 6.2
  Bottom Layer w0.4: LTC1.32@100.09,78.075 100.375,78.075 101.483,76.967 101.483,76.317 C20.1 101.975,76.05 R19.1 pad.7
pads on no net: "MicroUSB B 1.0" "MicroUSB B 1.2" "MicroUSB B 1.3" "MicroUSB B 1.4" ESP1.8 ESP1.9 ESP1.10 ESP1.11 ESP1.12 ESP1.13 ESP1.14 ESP1.16 ESP1.19 ESP1.20 ESP1.21 ESP1.22 ESP1.23 ESP1.26 ESP1.27 ESP1.28 ESP1.29 ESP1.30 ESP1.31 ESP1.32 ESP1.37 LSM1.10 LSM1.11 LTC1.23 LTC1.24 LTC1.25 LTC1.31

## Polygon pours and split planes (outlines as drawn)
GND on Top Layer "GND_UP" (solid, remove dead copper, pour order 6): 106.883,91.872 106.883,81.153 106.883,72.009 87.071,72.009 87.071,91.897 106.858,91.897
GND on Bottom Layer "GND_DOWN" (solid, remove dead copper, pour order 8): 106.883,91.897 106.883,81.153 106.883,72.009 87.097,72.009 87.097,91.897

## Silkscreen, mask and mechanical layers (free items; w line width, h text height)
Top Overlay:
  drawing of 65 lines, arcs and shapes, not listed
  text "ÁNGELES 7.OO" at 90.35,79.075 h1.28
  text "09/02/18" at 90.5,77.7 h1.5
Bottom Overlay:
  region: 550 vertices and 6 holes, not listed, extent 87.135,84.259 89.124,86.391
  text "0T" at 106.375,85.6 h1.28
  text "0R" at 105.6,84.4 h1.28
  text "V+" at 102,72.375 h1.28
  text "V-" at 106.475,72.375 h1.28
Mechanical 1:
  the board outline again, w0.3